# Altium PCB QUTMS-TSAL-V01-B00.PcbDoc
Units mil, origin at the board's own origin, x right, y up, seen from the top; angles counter-clockwise.
Board outline 1900 x 1875 mil, 2 copper layers (Top Layer, Bottom Layer); 38 components, 17 nets, 144 pads, 19 vias.
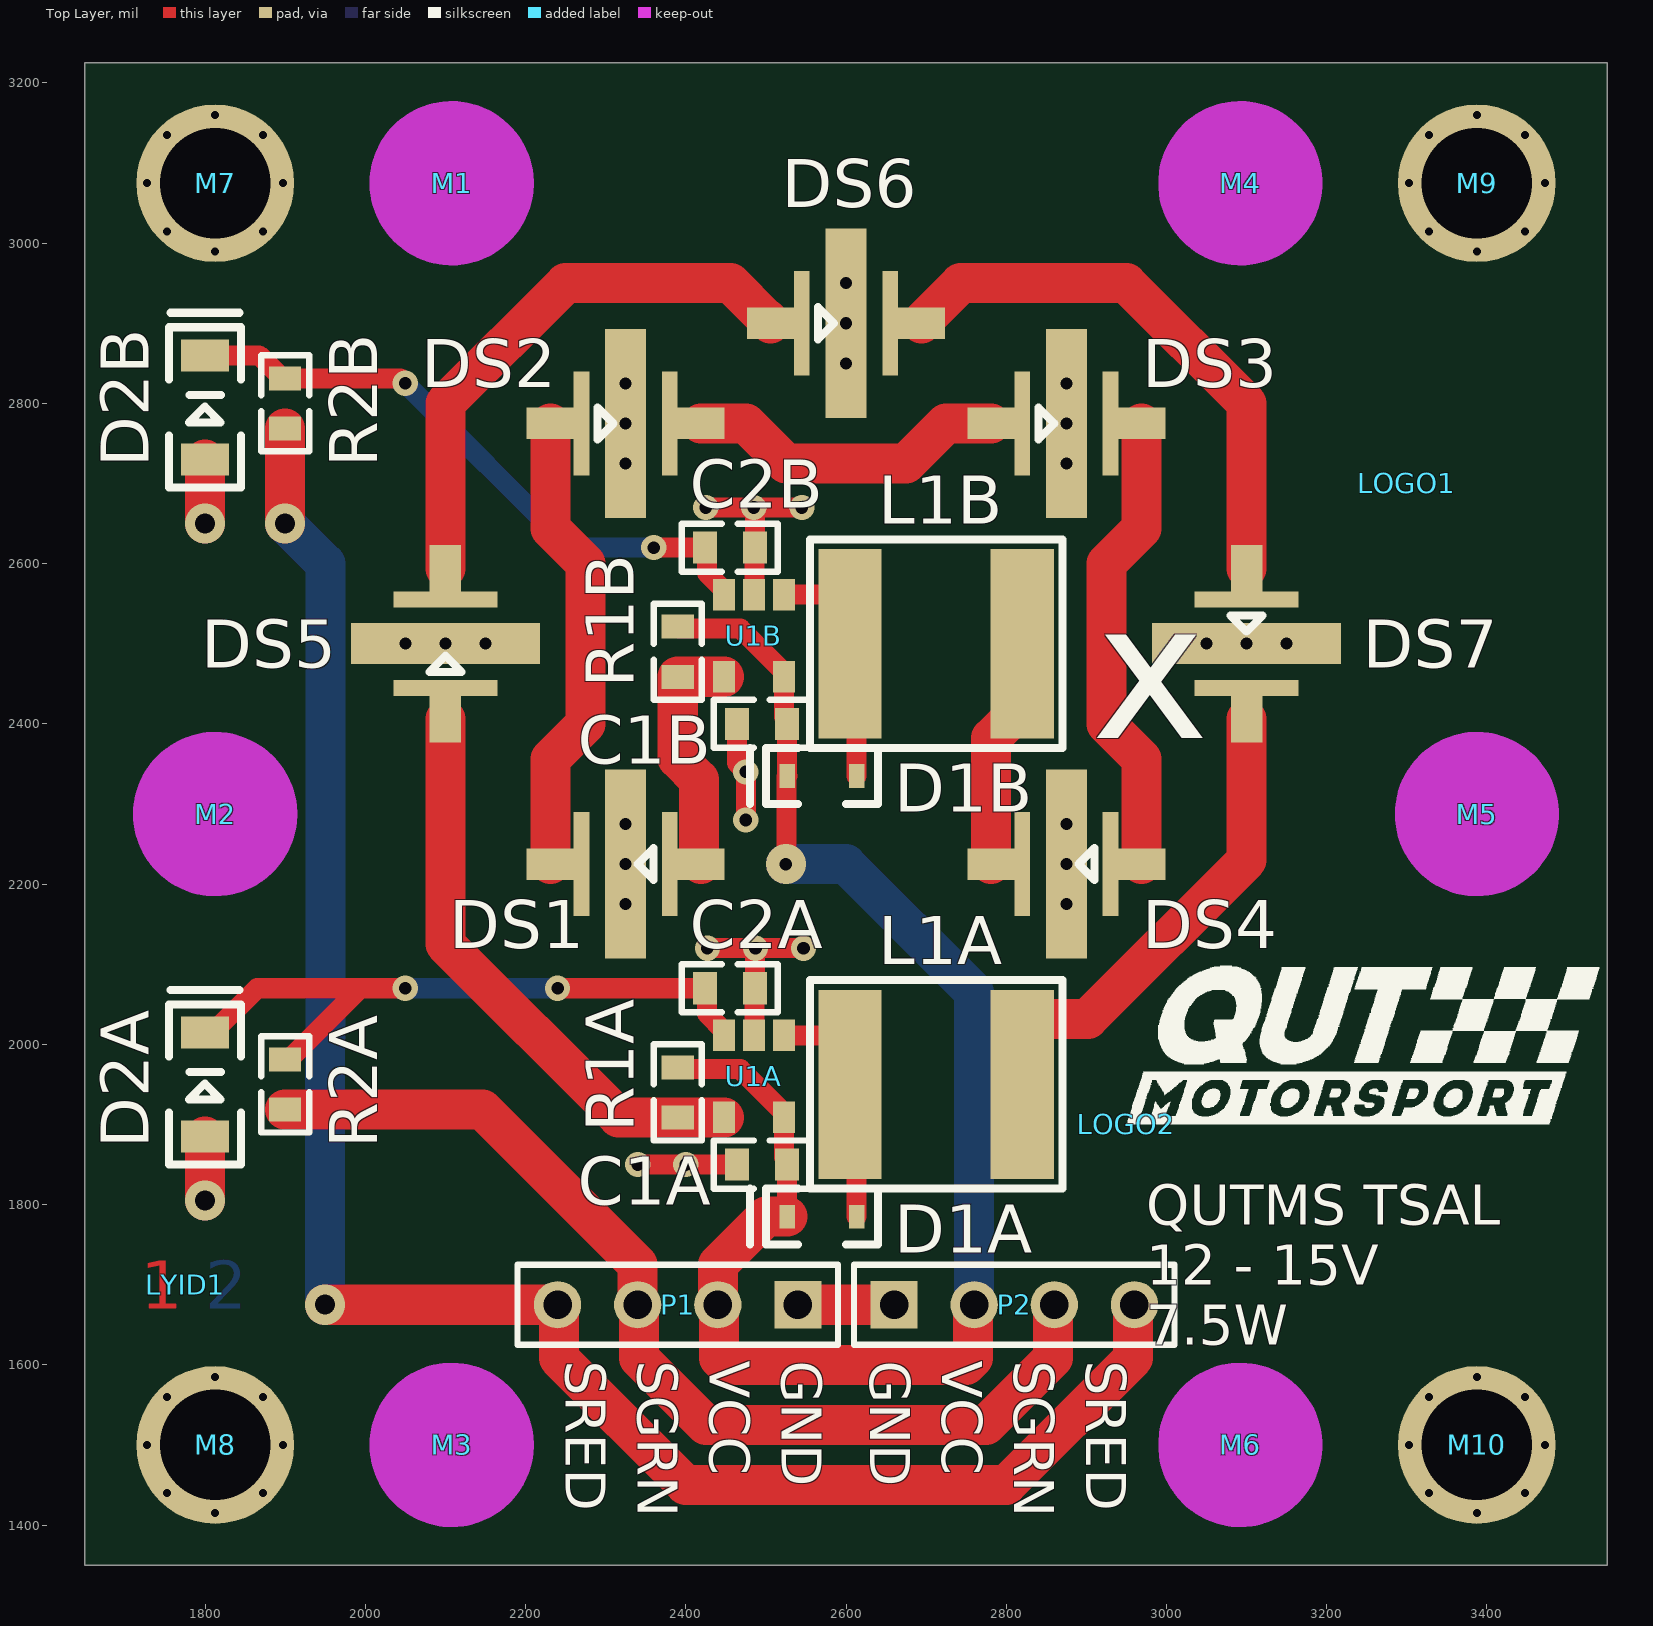
[diagram p0: Top Layer view]
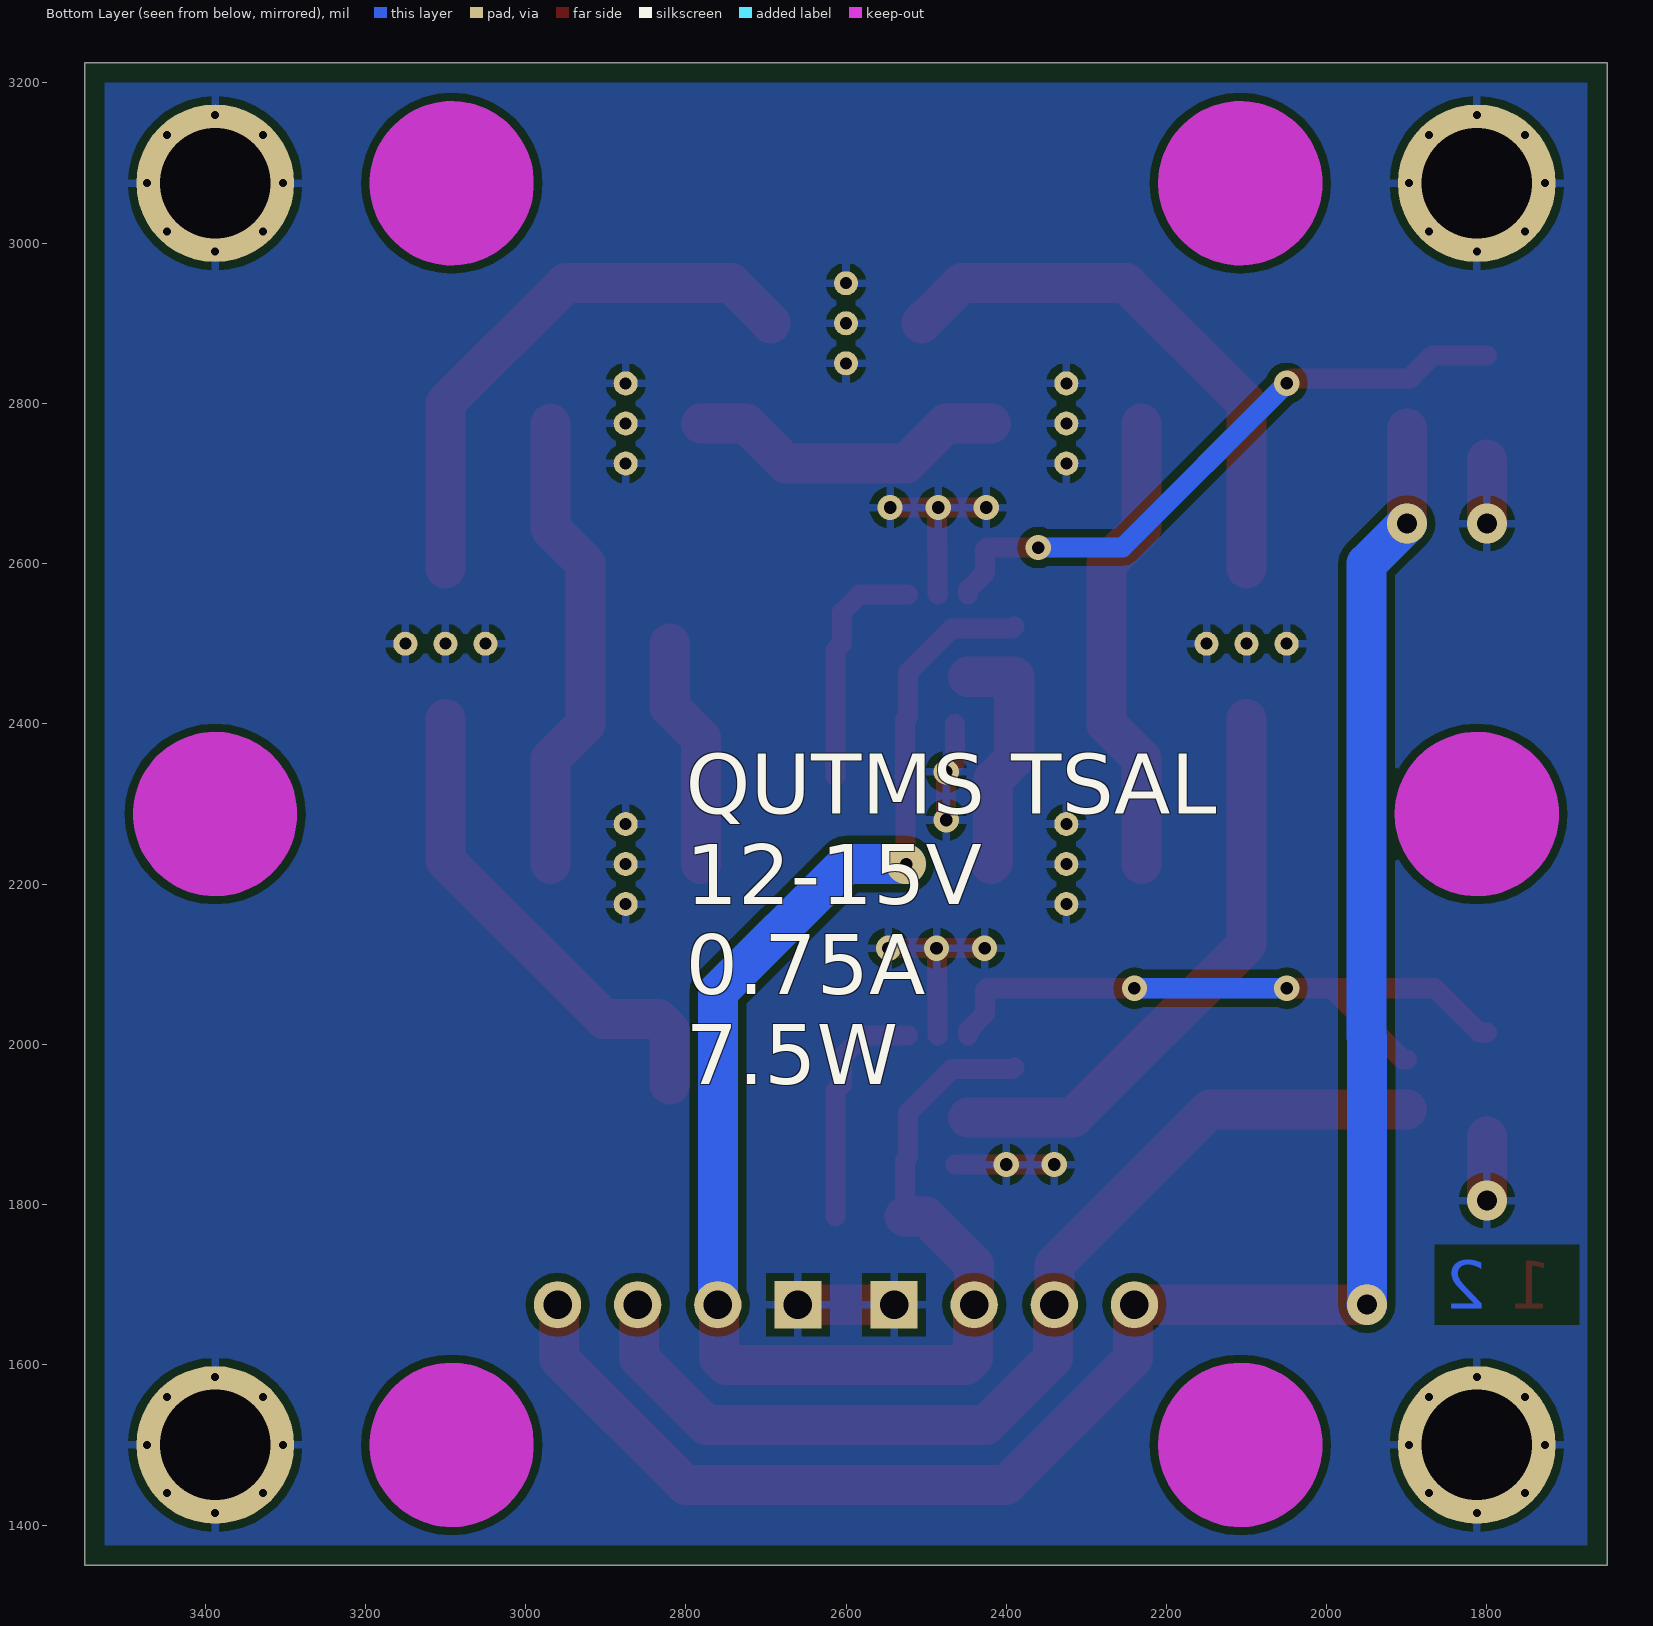
[diagram p1: Bottom Layer view, seen from below]
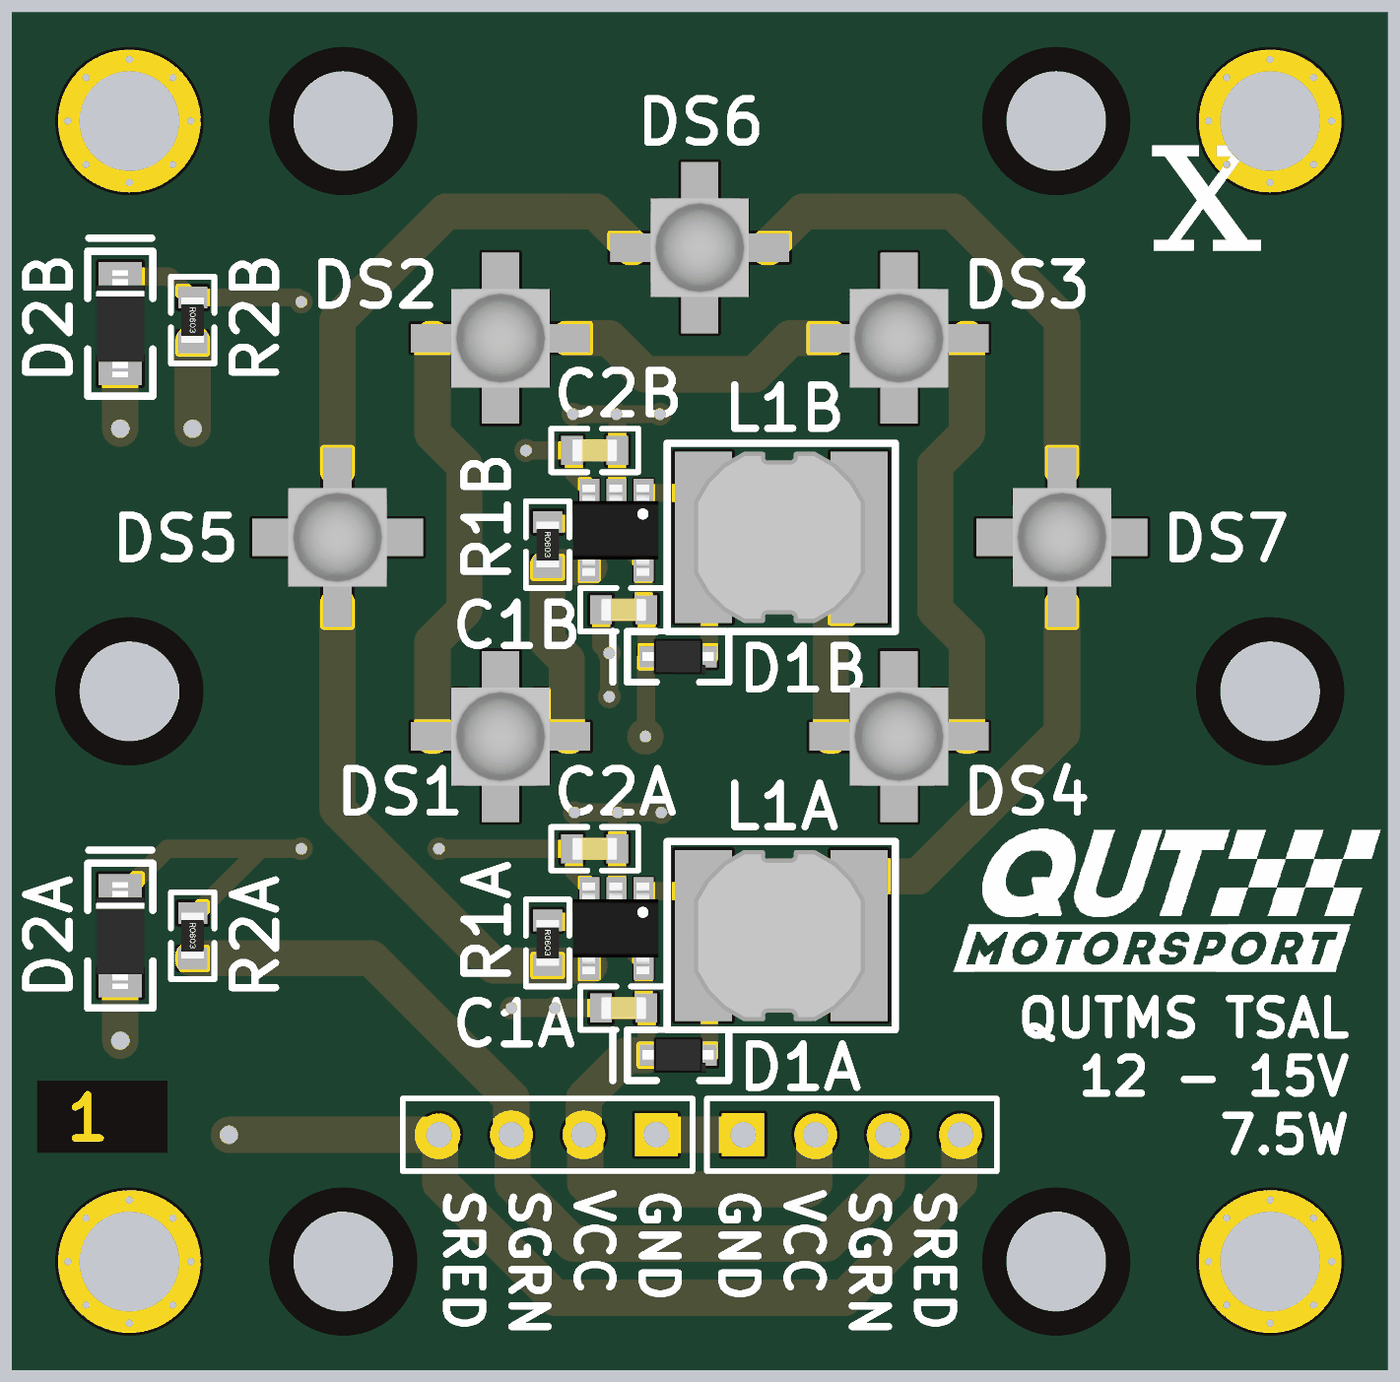
[diagram p2: 3D render of the assembled board from above, using the file's embedded part models]

## Layer stack, top to bottom
Top Solder: solder mask 0.4, Solder Resist, Dk 3.5
Top Layer: signal copper 1.4
Dielectric 1: dielectric 12.6, FR-4, Dk 4.8
Bottom Layer: signal copper 1.4
Bottom Solder: solder mask 0.4, Solder Resist, Dk 3.5

## Board outline
3550,3225 3550,1350 1650,1350 1650,3225

## Design rules (kind name [scope] priority, off if disabled: settings)
Clearance [All] p1: gap=10 ignorepadtopadclearanceinfootprint=FALSE except(0: Arc-Hole Track-Hole SMDPad-Hole THPad-Hole Via-Hole Fill-Hole Poly-Hole Region-Hole Text-Hole; 6: SMDPad-SMDPad)
PolygonConnect [All] p1: connectstyle=Relief reliefconductorwidth=10 reliefentries=4 polygonreliefangle="90 Angle" airgapwidth=10
RoutingVias [All] p1: holewidth=28 width=50 viastyle="Through Hole" minholewidth=15.75 minwidth=31.5 maxholewidth=28 maxwidth=50
SolderMaskExpansion [All] p1: expansion=4 istentingtop=FALSE
Width [All] p1: maxlimit=50 minlimit=25 preferedwidth=25 minimp=50.000000 maximp=50.000000 favimp=50.000000
30 further rules are at their usual default settings.

## Classes and differential pairs
channel class QUTMS-TSAL-V00-S04: "Voltage ReducerA" "Voltage ReducerB"
component class "Voltage ReducerB": D2B R2B
component class "Voltage ReducerA": D2A R2A
component class "RED LED ARRAY": DS1 DS2 DS3 DS4
component class "GREEN LED ARRAY": DS5 DS6 DS7
channel class QUTMS-TSAL-V00-S01: "GREEN LED DRIVER" "RED LED DRIVER" "RED LED DRIVERA" "RED LED DRIVERB"
component class QUTMS-TSAL-V00-S00: LOGO1 LOGO2 LYID1 M1 M2 M3 M4 M5 M6 M7 M8 M9 M10 P1 P2
component class "RED LED DRIVER": C1B C2B D1B L1B R1B U1B
component class "GREEN LED DRIVER": C2A D1A L1A R1A U1A

## Components (designator, comment, footprint, x,y, rotation, side; value= is the part's Value field where it differs from the comment)
C1A "10uF X7R" Cap_Ceramic_0603 2495,1850 r0 top (schematic designator C1)
C1B "10uF X7R" Cap_Ceramic_0603 2495,2400 r0 top (schematic designator C1)
C2A "4n7" Cap_Ceramic_0603 2455,2070 r180 top (schematic designator C2)
C2B "4n7" Cap_Ceramic_0603 2455,2620 r180 top (schematic designator C2)
D1A "PMEG2005EJ" SOD-323F 2570,1785 r180 top (schematic designator D1)
D1B "PMEG2005EJ" SOD-323F 2570,2335 r180 top (schematic designator D1)
D2A "4.7V" SOD123 1800,1950 r90 top (schematic designator D2)
D2B "4.7V" SOD123 1800,2795 r90 top (schematic designator D2)
DS1 "Cree XLamp XP-E2 Red" "Cree XLamp XP-E2" 2325,2225 r180 top
DS2 "Cree XLamp XP-E2 Red" "Cree XLamp XP-E2" 2325,2775 r0 top
DS3 "Cree XLamp XP-E2 Red" "Cree XLamp XP-E2" 2875,2775 r0 top
DS4 "Cree XLamp XP-E2 Red" "Cree XLamp XP-E2" 2875,2225 r180 top
DS5 "Cree XLamp XP-E2 Green" "Cree XLamp XP-E2" 2100,2500 r90 top
DS6 "Cree XLamp XP-E2 Green" "Cree XLamp XP-E2" 2600,2900 r0 top
DS7 "Cree XLamp XP-E2 Green" "Cree XLamp XP-E2" 3100,2500 r270 top
L1A "SRN6045" "Bourns Inductor 6x6x4.5mm" 2710,1950 r0 top (schematic designator L1)
L1B "SRN6045" "Bourns Inductor 6x6x4.5mm" 2710,2500 r0 top (schematic designator L1)
LOGO1 "LBL Hot Surface M" "LBL HOT MEDIUM" 3300,2700 r0 top
LOGO2 "15mm Wide QUTMS Logo" "QUTMS LOGO 15MM" 2950,1900 r0 top
LYID1 "2 Layer Identification PCB Marker" "LAYER IDENT 2" 1775,1700 r0 top
M1 "Hole M3 Loose Unplated" "M3.5 UNPLATED" 2107.87,3074.8 r0 top
M2 "Hole M3 Loose Unplated" "M3.5 UNPLATED" 1812.6,2287.4 r0 top
M3 "Hole M3 Loose Unplated" "M3.5 UNPLATED" 2107.87,1500 r0 top
M4 "Hole M3 Loose Unplated" "M3.5 UNPLATED" 3092.13,3074.8 r0 top
M5 "Hole M3 Loose Unplated" "M3.5 UNPLATED" 3387.4,2287.4 r0 top
M6 "Hole M3 Loose Unplated" "M3.5 UNPLATED" 3092.13,1500 r0 top
M7 "Hole M3 Loose Plated" "M3.5 PLATED" 1812.6,3074.8 r0 top
M8 "Hole M3 Loose Plated" "M3.5 PLATED" 1812.6,1500 r0 top
M9 "Hole M3 Loose Plated" "M3.5 PLATED" 3387.4,3074.8 r0 top
M10 "Hole M3 Loose Plated" "M3.5 PLATED" 3387.4,1500 r0 top
P1 "Header 4" HDR1X4 2540,1675 r180 top
P2 "Header 4" HDR1X4 2660,1675 r0 top
R1A "0R27" Res_ThinFilm_0603 2390,1940 r270 top (schematic designator R1)
R1B "0R27" Res_ThinFilm_0603 2390,2490 r270 top (schematic designator R1)
R2A "10k" Res_ThinFilm_0603 1900,1950 r270 top (schematic designator R2)
R2B "10k" Res_ThinFilm_0603 1900,2800 r270 top (schematic designator R2)
U1A "AL8860WT-7" TSOT-25 2485,1960 r180 top (schematic designator U1)
U1B "AL8860WT-7" TSOT-25 2485,2510 r180 top (schematic designator U1)

## Footprints (in the part's own frame and the unit in brackets; to place one, negate y for a bottom-side part, rotate by r counter-clockwise, add the part's x,y. Pads: shape width x height; smd on the part's side, far side on the other; paste and mask are expansions set on the pad)
"Bourns Inductor 6x6x4.5mm" [mm]
  rect 2x6 smd: 1(-2.667,0) 2(2.794,0)
  silkscreen extent -3.94,-3.3 4.06,3.3, body extent -3,-3 3,3, height 4.5
Cap_Ceramic_0603 [mil]
  rect 30x40 smd: 1(-31.24,0) 2(31.24,0)
  silkscreen extent -60,-30 60,30, body extent -31,-16 32,16, height 33
"Cree XLamp XP-E2" [mm]
  rect 1.5x1 smd: A(-2.388,0) K(2.388,0)
  rect 0.5x3.3 smd: A(-1.4,0) K(1.4,0)
  round 0.762 hole 0.381: HS(0,1.27) HS(0,0) HS(0,-1.27)
  rect 1.3x6 smd: HS(0,0)
  silkscreen extent -0.89,-0.51 -0.38,0.51, body extent -1.73,-1.72 1.72,1.73, height 2.31
HDR1X4 [mm] "Connector; Header; 4 Position"
  rect 1.5x1.5 hole 0.9: 1(0,0)
  round 1.5 hole 0.9: 2(2.54,0) 3(5.08,0) 4(7.62,0)
  silkscreen extent -1.27,-1.27 8.89,1.27
"LAYER IDENT 2" [mil]
  Top Layer pour cut-out: -20,-5
  Top Layer pour cut-out: -10,30
  Top Layer pour cut-out: -90,50 -90,-50 90,-50 90,50
  Bottom Layer pour cut-out: -90,50 -90,-50 90,-50 90,50
"LBL HOT MEDIUM" [mil]
"M3.5 PLATED" [mil]
  round 20 hole 10: 1(-85,0) 1(-60,-60) 1(-60,60) 1(0,-85) 1(0,85) 1(60,-60) 1(60,60) 1(85,0)
  round 196.85 hole 137.8: 1(0,0)
"M3.5 UNPLATED" [mm]
  round 0 hole 3.5 unplated mask+2.6: 1(0,0)
  Keep-Out Layer circle w2.667: c0,0 r1.27
"QUTMS LOGO 15MM" [mil]
  silkscreen extent 0,0 590,198
Res_ThinFilm_0603 [mil]
  rect 30x40 smd: 1(-31.24,0) 2(31.24,0)
  silkscreen extent -60,-30 60,30, body extent -31,-16 32,16, height 18
SOD123 [mil]
  rect 40x60 smd: A(-65,0) K(65,0)
  silkscreen extent -100,-45 118,45, body extent -74,-33 74,33, height 47
SOD-323F [mm]
  rect 0.5x0.75 smd: A(-1.1,0) K(1.1,0)
  silkscreen extent -1.78,-0.89 2.29,0.89, body extent -1.25,-0.64 1.25,0.61, height 0.68
TSOT-25 [mm]
  rect 0.7x1 smd mask+0.051: 1(-0.95,-1.3) 2(0,-1.3) 3(0.95,-1.3) 4(0.95,1.3) 5(-0.95,1.3)
  body extent -1.48,-1.6 1.52,1.6, height 0.92

## Part data
C1A C1B: library part "10uF 50V 5% X7R 0603", "Capacitor, Ceramic, SMD, 10uF, 50V, 5%, X7R, 0603"
C2A C2B: library part "4n7 25V 5% X7R 0603", "Capacitor, Ceramic, SMD, 4n7, 25V, 5%, X7R, 0603"
D1A D1B: "PMEG2005EJ,115 -  Schottky Rectifier, 20 V, 500 mA, Single, SOD-323F, 2 Pins, 390 mV", ComponentLink1Description=Element14, ComponentLink1URL=https://au.element14.com/nexperia/pmeg2005ej-115/schottky-rect-20v-0-5a-sod323f/dp/1757760
D2A D2B: library part MMSZ4688T1G, "MMSZ4688T1G -  Zener Single Diode, 4.7 V, 500 mW, SOD-123, 5 %, 2 Pins, 150 °C", ComponentLink1Description=Element14, ComponentLink1URL=https://au.element14.com/on-semiconductor/mmsz4688t1g/zener-voltage-vz-typ-4-7v/dp/1459118
DS1 DS2 DS3 DS4: "XPEBRD-L1-0000-00601 -  High Brightness LED, XLamp XP-E2 Series, Red, 630 nm, 130 °, 62 lm, 1 A", ComponentLink1Description=Element14, ComponentLink1URL=https://au.element14.com/cree/xpebrd-l1-0000-00601/led-smd-xlamp-xpe-e-red-62lm/dp/2335107
DS5 DS6 DS7: "XPEBGR-L1-0000-00A01 -  High Brightness LED, XLamp XP-E2 Series, Green, 535 nm, 135 °, 87.4 lm, 1 A", ComponentLink1Description=Element14, ComponentLink1URL=https://au.element14.com/cree/xpebrd-l1-0000-00601/led-smd-xlamp-xpe-e-red-62lm/dp/2335107
L1A L1B: "Power Inductor (SMD), 100 µH, 700 mA, Semishielded, 800 mA", ComponentLink1Description=Element14, ComponentLink1URL=https://au.element14.com/bourns/srn6045-101m/inductor-100uh-semi-shielded-power/dp/2061658
LOGO2: library part "QUTMS Logo 15mm"
LYID1: library part "Layer Identification 2"
M1 M2 M3 M4 M5 M6: "M3.5 Hole, No Plating"
M7 M8 M9 M10: "M3.5 Hole, Plated"
P1 P2: "Header, 4-Pin", LatestRevisionDate=17-Jul-2002, LatestRevisionNote="Re-released for DXP Platform.", Publisher="Altium Limited"
R1A R1B: library part "0R27 1% 0603", "ERJ3RQFR27V - SMD Current Sense Resistor, 0273 ohm, ERJ3R Series, 0603 [1608 Metric], 100 mW, ± 1%, Thick Film", ComponentLink1Description=Element14, ComponentLink1URL=https://au.element14.com/tt-electronics-welwyn/lcs0603-r30ft5/current-sense-res-0r3-1-100-mw/dp/2663681
R2A R2B: library part "10k 5% 0603", "Resistor, SMD, 10k, 0.1W, 5%, 0603"
U1A U1B: "AL8860WT-7 -  LED Driver, 1 Output, Buck (Step Down), 4.5 V to 40 V in, 1 MHz switch, PWM, 40V/1 A out, TSOT-25-5"

## Via types
v1: diameter 31.5, hole 15.75, Top Layer to Bottom Layer, tented both sides, 10 vias
v2: diameter 50, hole 25, Top Layer to Bottom Layer, tented bottom, 4 vias
v3: diameter 31.5, hole 15.75, Top Layer to Bottom Layer, tented bottom, 4 vias
v4: diameter 50, hole 15.75, Top Layer to Bottom Layer, tented bottom, 1 vias

## Nets (pads, with @x,y where several pads share a name; then routed paths per layer and width w, separated by ;. In a path a pad name is that pad's centre, name@x,y a point inside that pad or via, vN(x,y) a via of type N, cw(c..) or ccw(c..) an arc to the next point about the centre after c; other vN are vias at no path point)
GND: C1A.1 C1B.1 C2A.1 C2B.1 D2A.A D2B.A DS1.HS DS2.HS DS3.HS DS4.HS DS5.HS DS6.HS DS7.HS M7.1 M8.1 M9.1 M10.1 P1.1 P2.1 U1A.2 U1B.2 | length 987.9
  Top Layer w25: v1(2340,1850) v1(2400,1850) C1A.1 ; v1(2425,2670) v1(2485,2670) ; v1(2427,2120) v1(2487,2120) ; C1B.1 2463.76,2351.24 v1(2475,2340) v1(2475,2280) ; U1A.2 2485.62,2011.8 2485.62,2069.38 C2A.1 2486.24,2119.24 v1(2487,2120) ; U1B.2 2485.62,2561.8 2485.62,2619.38 C2B.1 2486.24,2668.76 v1(2485,2670) ; v1(2545,2670) v1(2485,2670) ; v1(2547,2120) v1(2487,2120)
  Top Layer w50: v2(1800,1805) D2A.A ; v2(1800,2650) D2B.A ; P1.1 P2.1
NetC2A_2: C2A.2 D2A.K R2A.1 U1A.3 | length 845.8
  Top Layer w25: D2A.K 1810,2015 1865,2070 1993.76,2070 ; R2A.1 1905,1981.24 1993.76,2070 ; v3(2050,2070) 1993.76,2070 ; v3(2240,2070) C2A.2 2426.26,2067.5 2426.26,2038.42 2447.6,2017.09 U1A.3
  Bottom Layer w25: v3(2050,2070) v3(2240,2070)
NetC2B_2: C2B.2 D2B.K R2B.1 U1B.3 | length 792.6
  Top Layer w25: D2B.K 1867.5,2860 1892.5,2835 1892.5,2833.74 1895,2831.24 R2B.1 2043.76,2831.24 v3(2050,2825) ; v3(2360,2620) C2B.2 2426.26,2617.5 2426.26,2588.42 2447.6,2567.09 U1B.3
  Bottom Layer w25: v3(2050,2825) 2255,2620 v3(2360,2620)
NetDS1_K: DS1.K DS2.A | length 586.5
  Top Layer w50: DS1.K@2231,2225 2231,2356 2275,2400 2275,2600 2231,2644 2231,2755 DS2.A@2231,2775
NetDS2_K: DS2.K DS3.A | length 403.4
  Top Layer w50: DS2.K@2419,2775 2475,2775 2525,2725 2675,2725 2725,2775 DS3.A@2781,2775
NetDS3_K: DS3.K DS4.A | length 586.5
  Top Layer w50: DS4.A@2969,2225 2969,2356 2925,2400 2925,2600 2969,2644 DS3.K@2969,2775
NetDS5_K: DS5.K DS6.A | length 695.3
  Top Layer w50: DS5.K@2100,2594 2100,2800 2250,2950 2456,2950 2500.69,2905.31 2501.47,2905.31 2506,2900.79 DS6.A@2506,2900
NetDS6_K: DS6.K DS7.A | length 695.3
  Top Layer w50: DS6.K@2694,2900 2694,2900.79 2743.21,2950 2950,2950 3100,2800 DS7.A@3100,2594
SGRN: P1.3 P2.3 R2A.2 | length 1290.7
  Top Layer w50: R2A.2 2146.24,1918.76 2340,1725 P1.3 2341.73,1673.27 2341.73,1608.27 2425,1525 2775,1525 2858.27,1608.27 2858.27,1673.27 P2.3
SRED: P1.4 P2.4 R2B.2 | length 2387.2
  Top Layer w50: v2(1900,2650) R2B.2 ; v2(1950,1675) P1.4 2241.73,1673.27 2241.73,1608.27 2400,1450 2800,1450 2958.27,1608.27 2958.27,1673.27 P2.4
  Bottom Layer w50: v2(1900,2650) 1950.1,2599.9 1950.1,2009.73 1950,2009.63 v2(1950,1675) v2@1950.1,1675.1
SWA: D1A.A L1A.1 U1A.1 | length 296.5
  Top Layer w25: U1A.1 2578.13,2011.18 2605,1984.31 L1A.1 2613.31,1941.69 D1A.A
SWB: D1B.A L1B.1 U1B.1 | length 299.4
  Top Layer w25: U1B.1 2583.13,2561.18 2605,2539.31 L1B.1 2613.31,2491.69 D1B.A
VCC: C1A.2 C1B.2 D1A.K D1B.K P1.2 P2.2 R1A.1 R1B.1 U1A.5 U1B.5 | length 1996.4
  Top Layer w25: R1A.1 2392.24,1969 2468.13,1969 2522.4,1914.72 U1A.5 2522.4,1858.83 2526.46,1854.77 2526.46,1785.23 D1A.K ; R1B.1 2392.24,2519 2468.13,2519 2522.4,2464.72 U1B.5 2522.4,2408.83 2526.24,2405 C1B.2 2526.46,2399.77 2526.46,2335.23 D1B.K 2525.85,2334.15 2525.85,2225.85 v4(2525,2225)
  Top Layer w50: D1A.K 2500,1785 2440,1725 P1.2 2441.73,1673.27 2441.73,1608.27 2450,1600 2750,1600 2758.27,1608.27 2758.27,1673.27 P2.2
  Bottom Layer w50: v4(2525,2225) 2600,2225 2760,2065 P2.2
VLED-GREEN: DS5.A R1A.2 U1A.4 | length 718.2
  Top Layer w50: DS5.A@2100,2406 2100,2125 2316.24,1908.76 R1A.2 2447.54,1908.76 U1A.4
VLED-RED: DS1.A R1B.2 U1B.4 | length 303.4
  Top Layer w50: DS1.A@2419,2225 2416.46,2227.54 2416.46,2330.31 2390,2356.78 R1B.2 2390.06,2458.82 U1B.4
VOUT-GREEN: DS7.K L1A.2 | length 611.5
  Top Layer w50: L1A.2 2820,2017.4 2834.37,2031.77 2901.77,2031.77 3100,2230 DS7.K@3100,2406
VOUT-RED: DS4.K L1B.2 | length 291.2
  Top Layer w50: DS4.K@2781,2225 2781,2382.26 2820,2421.26 L1B.2
pads on no net: M1.1 M2.1 M3.1 M4.1 M5.1 M6.1

## Polygon pours and split planes (outlines as drawn)
GND on Bottom Layer "GND" (solid, pour order 0): 1675,1375 1675,3200 3525,3200 3525,1375

## Silkscreen, mask and mechanical layers (free items; w line width, h text height)
Top Overlay:
  text "QUTMS TSAL / 12 - 15V / 7.5W" at 2975,1625 h50
  text "SRED" at 2250,1605 h50 r270
  text "SGRN" at 2340,1605 h50 r270
  text "VCC" at 2430,1605 h50 r270
  text "GND" at 2520,1605 h50 r270
  text "GND" at 2630,1605 h50 r270
  text "VCC" at 2720,1605 h50 r270
  text "SGRN" at 2810,1605 h50 r270
  text "SRED" at 2900,1605 h50 r270
Bottom Overlay:
  text "QUTMS TSAL / 12-15V / 0.75A / 7.5W" at 2800,1950 h75

## Text inside footprints (layer, text, board x,y; h text height)
LOGO1: Top Overlay "x" at 2906.3,2306.3 h400
LYID1: Top Layer "1" at 1720,1670 h60; Bottom Layer "2" at 1800,1670 h60